# EAGLE board Automated room design (EAGLE 9.7.0)

Size 199.05 x 91.66 mm. Coordinates in mm from the lower left corner, seen from the top.
Outline: 0,0 199.05,0 199.05,91.66 0,91.66 0,0
Copper layers (1*16): Top 0.035mm / dielectric 1.5mm / Bottom 0.035mm
Design rules "default": minimum track width 6mil, minimum drill 0.35mm, track to track 6mil, track to pad 6mil, pad to pad 6mil, via to via 6mil, smd to smd 6mil, copper to edge 40mil, drill to drill 6mil, minimum pad ring 10mil, minimum via ring 8mil, stop-mask expansion 4mil, vias tented up to drill 0mil, thermal gap 10mil

## Footprints (pad centres in the part's own frame; a part is rotated, then mirrored left to right if it is on the bottom)
WS2812-STRIP = drill 1.016 long: 1 -3.81,0; 2 -1.27,0; 3 1.27,0; 4 3.81,0
BATTERY-GENERIC = drill 1.118 pad 3.15 octagon: + 2.54,0; - -2.54,0
DIP787W55P254L958H533Q8B-8P3 = drill 0.852 pad 1.452: 1 -3.81,3.81; 2 -3.81,1.27; 3 -3.81,-1.27; 4 -3.81,-3.81; 5 3.81,-3.81; 6 3.81,-1.27; 7 3.81,1.27; 8 3.81,3.81

## Placement (x,y rotation side)
LED1  WS2812B_STRIP  [WS2812-STRIP]  54.36,83.33 270 top
LED2  WS2812B_STRIP  [WS2812-STRIP]  190.72,77.84 180 top
LED3  WS2812B_STRIP  [WS2812-STRIP]  185.14,8.33 90 top
P1  BATTERYGENERIC  [BATTERY-GENERIC]  8.26,39.8 180 top
U1  ATtiny25-20PU  [DIP787W55P254L958H533Q8B-8P3]  62.24,43.42 90 top

## Library data of the parts
LED1-LED3 P1 = Tinkercad
U1 = Tinkercad; CATEGORY: IC_Embedded; CORE: AVR; DESCRIPTION: AVR AVR® ATtiny, Functional Safety (FuSa) Microcontroller IC 8-Bit 20MHz 2KB (1K x 16) FLASH 8-PDIP; MANUFACTURER: Microchip Technology; MPN: ATtiny25-20PU; OPERATING_TEMP: -40°C to 85°C; PART_STATUS: Active; ROHS_COMPLIANT: COMPLIANT; SERIES: ATtiny25; SPEED: 20 MHz; SUB-CATEGORY: Microcontroller; TYPE: AVR Microcontroller

## Nets
LED1_DOUT: LED1.4 LED2.1
LED2_DOUT: LED2.4 LED3.1
P1+: LED1.2 LED2.2 LED3.2 P1.+ U1.8
P1-: LED1.3 LED2.3 LED3.3 P1.- U1.4
U1_PB2: LED1.1 U1.7

## Tracks (layer width: path | path; a pad name or v marks a point on that pad's centre or on a via)
LED1_DOUT  (1 unrouted)
LED2_DOUT  (1 unrouted)
P1+  (4 unrouted)
P1-  (4 unrouted)
U1_PB2  (1 unrouted)